# EAGLE board gondola (EAGLE 8.3.2)
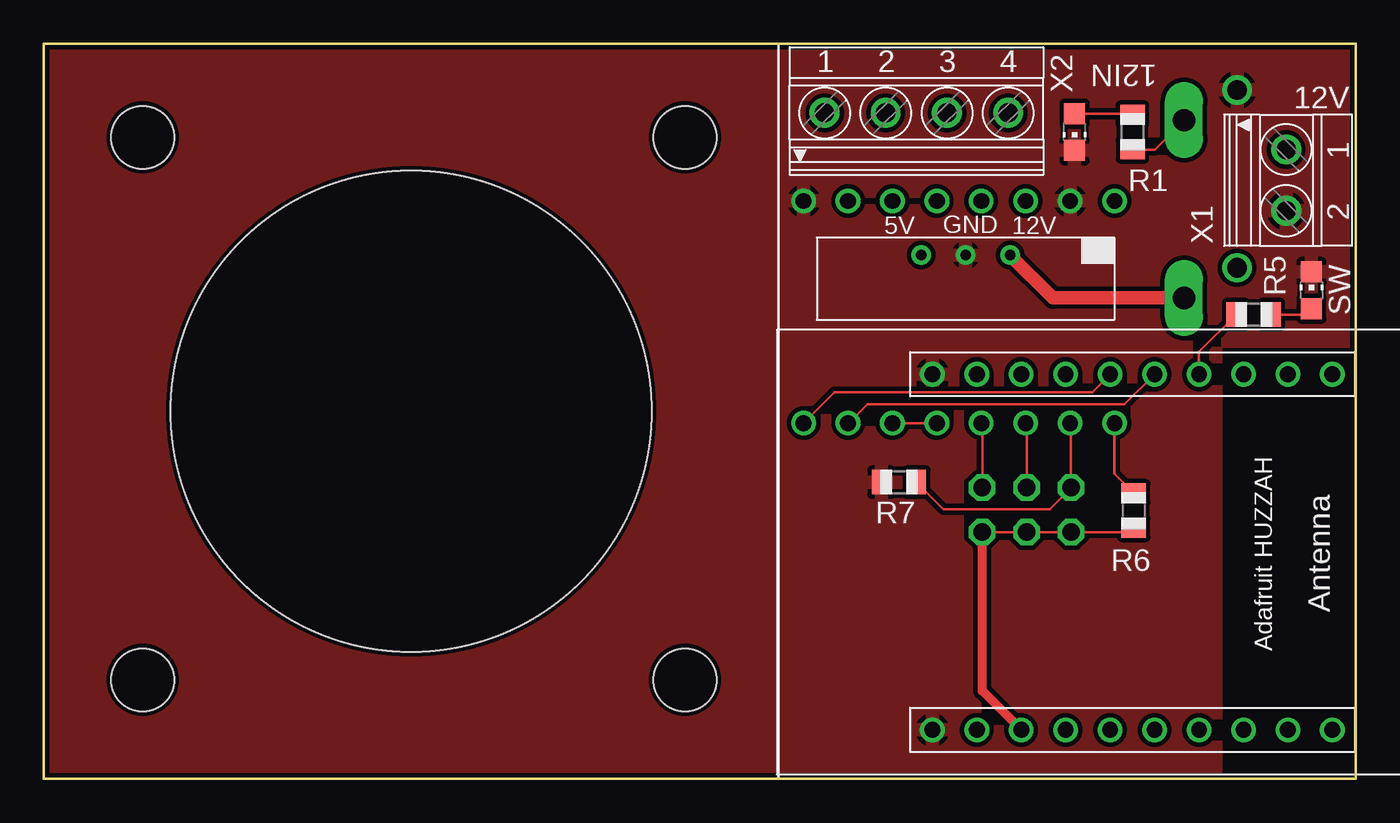
[diagram p0: board, top side]
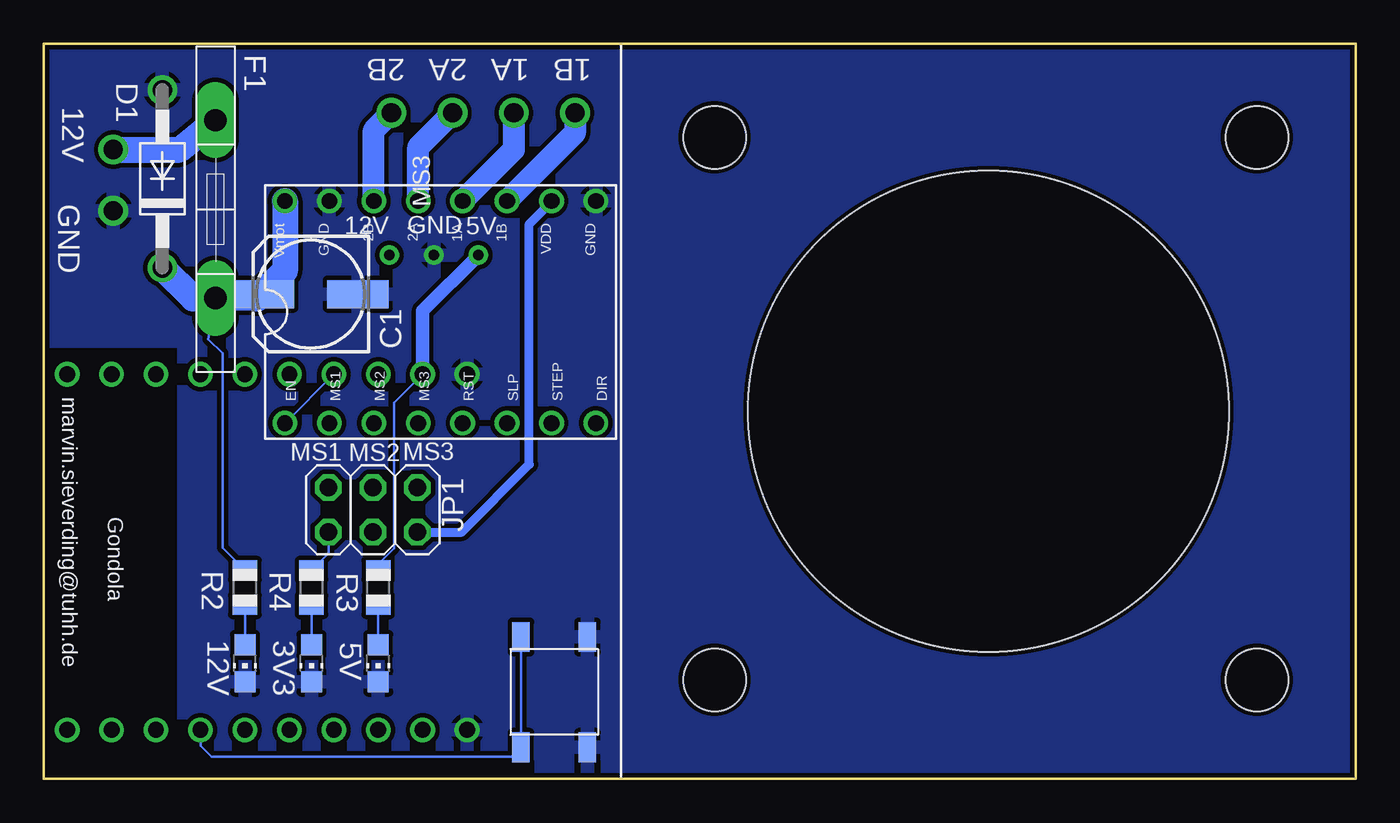
[diagram p1: board, bottom side, seen from below]

Size 75 x 42 mm. Coordinates in mm from the lower left corner, seen from the top.
Outline: 0,0 0,42 75,42 75,0 0,0
Copper layers (1*16): Top 0.035mm / dielectric 1.5mm / Bottom 0.035mm
Design rules "dirt_cheap_dirty_boards.v1": minimum track width 5mil, minimum drill 12mil, track to track 5mil, track to pad 5mil, pad to pad 5mil, via to via 5mil, smd to smd 0mil, copper to edge 10mil, drill to drill 10mil, minimum pad ring 10mil, minimum via ring 6mil, stop-mask expansion 2mil, vias tented up to drill 25mil, thermal gap 10mil
Holes 3.6 mm at 5.65,5.65 36.65,36.65 5.65,36.65 36.65,5.65
Holes 27.5 mm at 21,21

## Footprints (pad centres in the part's own frame; a part is rotated, then mirrored left to right if it is on the bottom)
153CLV-0605 = smd 3.5 x 1.6: + 2.7,0; - -2.7,0
DO41-10 = drill 1.118: A 5.08,0; C -5.08,0
MFR500 = drill 1.27 pad 2.184 long: P$1 0,5.08; P$2 0,-5.08
2X03 = drill 1.016 octagon: 1 -2.54,-1.27; 2 -2.54,1.27; 3 0,-1.27; 4 0,1.27; 5 2.54,-1.27; 6 2.54,1.27
CHIP-LED0805 = smd 1.2 x 1.2: A 0,-1.05; C 0,1.05
R0805 = smd 1.1 x 1.4: 1 -1,0; 2 1,0
ROHM_BP5293-XX = drill 0.6: GND 0,-2.54; VIN -2.54,-2.54; VOUT 2.54,-2.54
A4988BREAKOUT = drill 0.9: 1A 8.89,1.27; 1B 11.43,1.27; 2A 6.35,1.27; 2B 3.81,1.27; DIR 16.51,-11.43; EN -1.27,-11.43; GND 16.51,1.27; GND@0 1.27,1.27; MS1 1.27,-11.43; MS2 3.81,-11.43; MS3 6.35,-11.43; RST 8.89,-11.43; SLP 11.43,-11.43; STEP 13.97,-11.43; VDD 13.97,1.27; VMOT -1.27,1.27
ADAFRUIT_ESP8266 = drill 0.9: 1_GND 22.86,8.89; 1_RESET_5V 2.54,31.75; 2_ADC 2.54,29.21; 2_LDO_EN 22.86,11.43; 3_3V3 22.86,13.97; 3_CH_PD 2.54,26.67; 4_GPIO15 22.86,16.51; 4_GPIO16 2.54,24.13; 5_GPIO2 22.86,19.05; 5_GPIO14 2.54,21.59; 6_GPIO0 22.86,21.59; 6_GPIO12 2.54,19.05; 7_GPIO4 22.86,24.13; 7_GPIO13 2.54,16.51; 8_GPIO5 22.86,26.67; 8_VIN 2.54,13.97; 9_RXD1_5V 22.86,29.21; 9_VBAT 2.54,11.43; 10_GND 2.54,8.89; 10_TXD1 22.86,31.75
FSMCTTR = smd 1.7 x 1: 1 -3.15,1.9; 2 3.15,1.9; 3 -3.15,-1.9; 4 3.15,-1.9
1751248 = drill 1.1 pad 1.7: 1 -1.75,-0.1; 2 1.75,-0.1
1751264 = drill 1.1 pad 1.7: 1 -5.25,-0.1; 2 -1.75,-0.1; 3 1.75,-0.1; 4 5.25,-0.1

## Placement (x,y rotation side)
C1  100µF  [153CLV-0605]  59.74,27.7 180 bottom
D1  1N4004  [DO41-10]  68.22,34.28 90 bottom
F1  MFR500  [MFR500]  65.18,32.56 0 bottom
JP1  [2X03]  56.19,15.37 0 bottom
LED1_12IN  [CHIP-LED0805]  58.93,36.96 180 top
LED2_12V  [CHIP-LED0805]  63.5,6.6 180 bottom
LED3_5V  [CHIP-LED0805]  55.88,6.6 180 bottom
LED4_3V3  [CHIP-LED0805]  59.69,6.6 180 bottom
LED5_SW  [CHIP-LED0805]  72.47,27.91 0 top
R1  4.7k  [R0805]  62.23,36.96 270 top
R2  4.7k  [R0805]  63.5,10.92 90 bottom
R3  1.2k  [R0805]  55.88,10.92 90 bottom
R4  330  [R0805]  59.69,10.92 90 bottom
R5  330  [R0805]  69.16,26.52 180 top
R6  100k  [R0805]  62.31,15.33 90 top
R7  100k  [R0805]  48.89,16.95 180 top
U1  ROHM_BP5293-XX  [ROHM_BP5293-XX]  52.7,27.39 180 top
U$1  A4988BREAKOUT  [A4988BREAKOUT]  59.94,31.75 0 bottom
U$2  ADAFRUIT_ESP8266  [ADAFRUIT_ESP8266]  41.91,25.65 270 top
U$4  FSMCTTR  [FSMCTTR]  45.82,4.95 270 bottom
X1  1751248  [1751248]  71.12,34.21 270 top
X2  1751264  [1751264]  49.88,38.15 0 top

## Library data of the parts
C1 R1-R7 = adafruit
D1 = diode
F1 U1 U$2 U$4 = MS
JP1 = pinhead
LED1_12IN LED2_12V LED3_5V LED4_3V3 LED5_SW = led
U$1 = RepRapjr
X1 = con-phoenix-350; OC_FARNELL: unknown; OC_NEWARK: unknown
X2 = con-phoenix-350; MPN: 1751264; OC_FARNELL: unknown; OC_NEWARK: 10R0934

## Nets
1A: U$1.1A X2.2
1B: U$1.1B X2.1
2A: U$1.2A X2.3
2B: U$1.2B X2.4
12V_IN: F1.P$1 R1.2 X1.1
!RESET: U$1.RST U$1.SLP
+3V3: JP1.1 JP1.3 JP1.5 R4.2 R6.1 U$1.VDD U$2.3_3V3
+5V: R3.2 U1.VOUT U$2.9_VBAT
+12V: C1.+ D1.C F1.P$2 R2.2 U1.VIN U$1.VMOT
DIR: U$1.STEP U$2.5_GPIO14
GND: C1.- D1.A LED1_12IN.C LED2_12V.C LED3_5V.C LED4_3V3.C LED5_SW.C R7.2 U1.GND U$1.GND U$1.GND@0 U$2.1_GND U$2.10_GND U$4.1 U$4.2 X1.2
M_EN: R6.2 U$1.EN U$2.7_GPIO13
MS1: JP1.2 R7.1 U$1.MS1
MS2: JP1.4 U$1.MS2
MS3: JP1.6 U$1.MS3
N$1: LED2_12V.A R2.1
N$2: LED1_12IN.A R1.1
N$8: LED4_3V3.A R4.1
N$18: LED5_SW.A R5.1
N$19: LED3_5V.A R3.1
STEP: U$1.DIR U$2.6_GPIO12
SW_BUT: U$2.7_GPIO4 U$4.3 U$4.4
SW_LED: R5.2 U$2.4_GPIO16

## Tracks (layer width: path | path; a pad name or v marks a point on that pad's centre or on a via)
1A
  Bottom 1.27: X2.2 48.13,35.94 U$1.1A
1B
  Bottom 1.27: X2.1 44.63,36.9 U$1.1B
2A
  Bottom 1.27: U$1.2A 53.59,36.09 X2.3
2B
  Bottom 1.27: U$1.2B 56.13,37.05 X2.4
12V_IN
  Top 0.152: R1.2 63.5,35.96 F1.P$1
  Bottom 1.499: X1.1 67.24,35.96 F1.P$1
!RESET
  Top 0.152: U$1.SLP U$1.RST
+3V3
  Top 0.152: R6.1 62.08,14.1 JP1.1 JP1.3 JP1.5
  Top 0.508: JP1.5 53.65,5.03 U$2.3_3V3
  Bottom 0.152: JP1.1 58.73,12.89 R4.2
  Bottom 0.508: U$1.VDD 45.95,32.99 47.24,31.7 47.24,17.96 51.1,14.1 JP1.5
+5V
  Bottom 0.152: R3.2 56.13,12.01 54.97,13.18 54.97,21.49 U$2.9_VBAT
  Bottom 0.508: U1.VOUT 50.34,29.93
  Bottom 0.762: U$2.9_VBAT 53.34,26.74 U1.VOUT
+12V
  Top 0.762: F1.P$2 57.69,27.48 U1.VIN
  Bottom 0.152: F1.P$2 65.59,25.13 64.77,24.31 64.77,13.19 R2.2
  Bottom 1.499: 62.79,27.45 F1.P$2 66.46,27.45 D1.C | 62.79,27.45 C1.+ | U$1.VMOT 61.21,29.02 62.79,27.45
DIR
  Top 0.152: U$1.STEP 46.02,20.32 47.09,21.39 61.77,21.39 U$2.5_GPIO14
GND
  pour Bottom (isolate 0.254): -1,43 -1,-1 67,-1 67,25 76,25 76,43
  pour Top (isolate 0.254): -1,44 -1,-1 67,-1 67,25 79,25 79,44
M_EN
  Top 0.152: U$1.EN 61.21,17.42 R6.2
  Bottom 0.152: U$1.EN U$2.7_GPIO13
MS1
  Top 0.152: R7.1 51.44,15.39 57.51,15.39 58.73,16.61 JP1.2 58.73,20.27 U$1.MS1
MS2
  Top 0.152: JP1.4 56.19,20.27 U$1.MS2
MS3
  Top 0.152: JP1.6 53.65,20.27 U$1.MS3
N$1
  Bottom 0.152: LED2_12V.A R2.1
N$2
  Top 0.152: 62.69,38.01 R1.1 62.18,38.01 LED1_12IN.A
N$8
  Bottom 0.152: R4.1 LED4_3V3.A
N$18
  Top 0.152: R5.1 72.12,26.52 LED5_SW.A
N$19
  Bottom 0.152: R3.1 LED3_5V.A
STEP
  Top 0.152: U$1.DIR 45.21,22.1 59.94,22.1 U$2.6_GPIO12
SW_BUT
  Bottom 0.152: U$2.7_GPIO4 66.04,1.88 65.41,1.25 48.28,1.25 U$4.4 U$4.3
SW_LED
  Top 0.152: U$2.4_GPIO16 66.04,24.39 R5.2

## Text on the board
tPlace: 12IN | 12V | 5V | GND | 12V | SW
bPlace: 1B | 1A | 2A | 2B | 12V | MS3 | GND | 5V | GND | 12V | marvin.sieverding@tuhh.de | MS1 | MS3 | MS2 | Gondola | 5V | 3V3 | 12V